# Altium PCB Programming Dongle PCB.PcbDoc
Units mm, origin at the board's own origin, x right, y up, seen from the top; angles counter-clockwise.
Board outline 25 x 18 mm, 4 copper layers (Component Side, Ground Plane, Power Plane, Solder Side), stack 1.1 mm thick; 22 components, 20 nets, 93 pads, 31 vias.
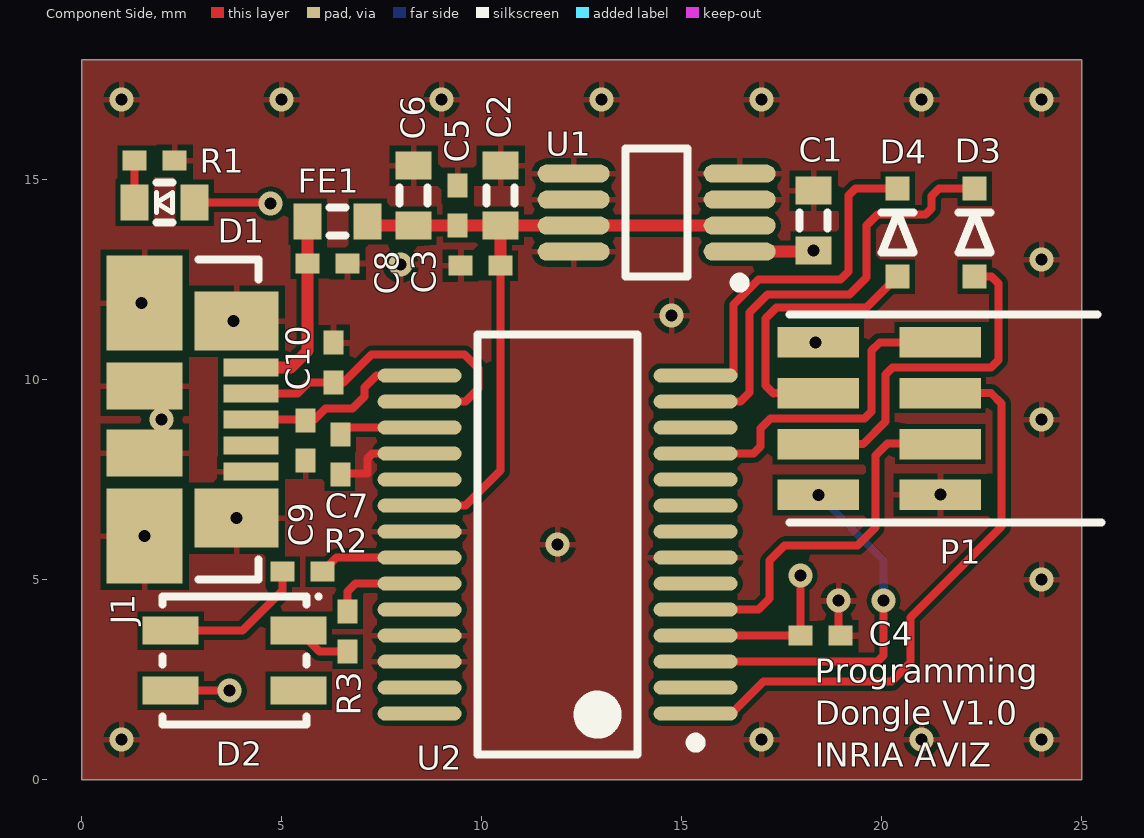
[diagram p0: Component Side view]
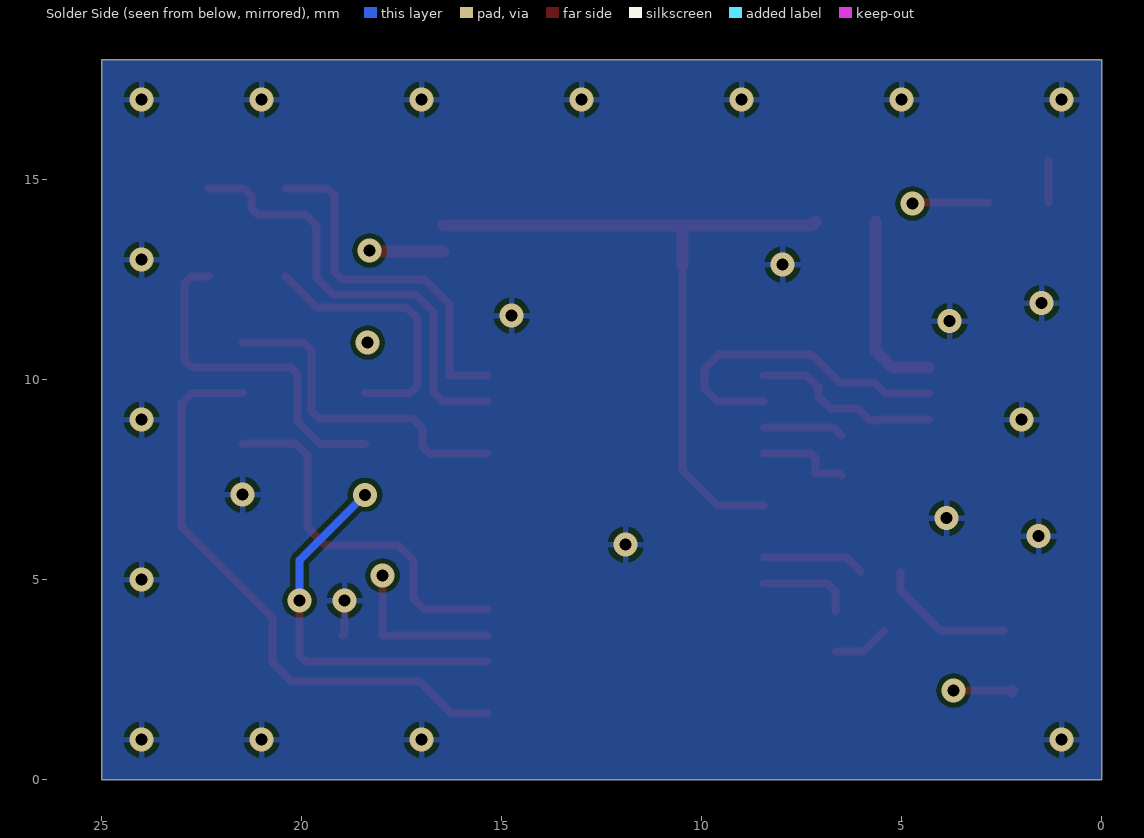
[diagram p1: Solder Side view, seen from below]
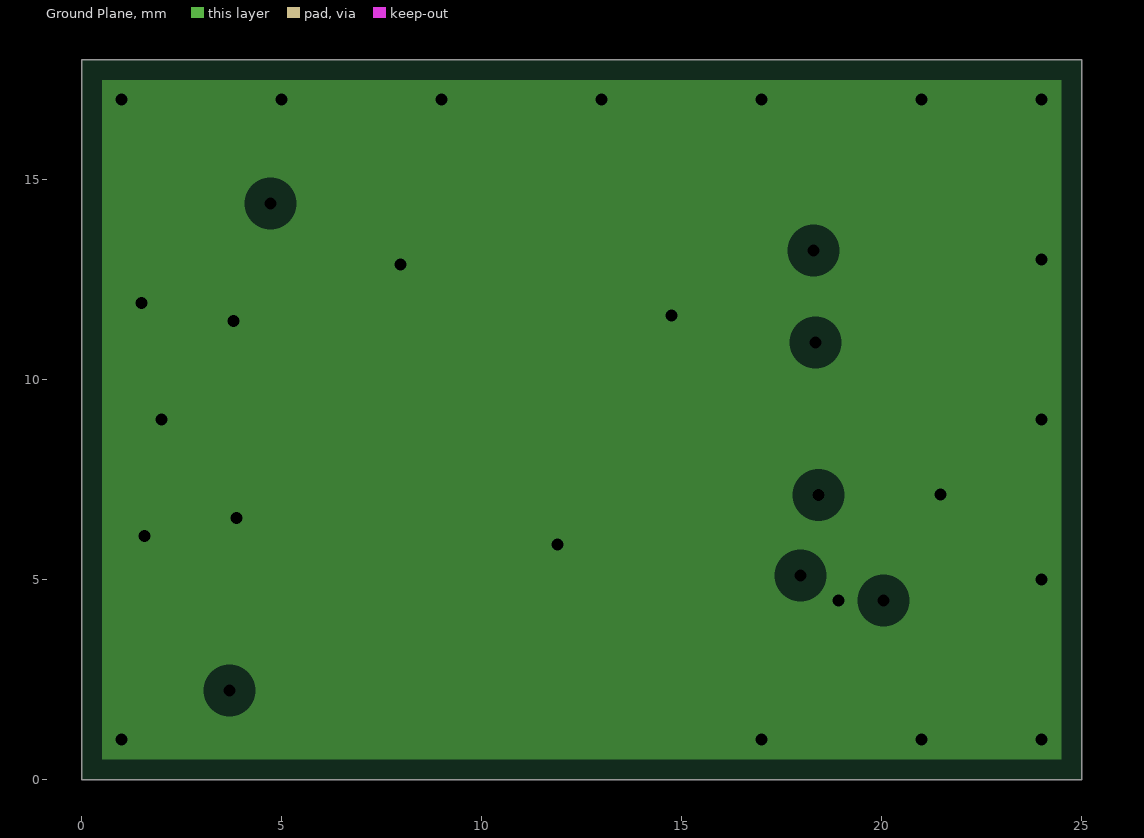
[diagram p2: Ground Plane, clearances drawn from the general rule]
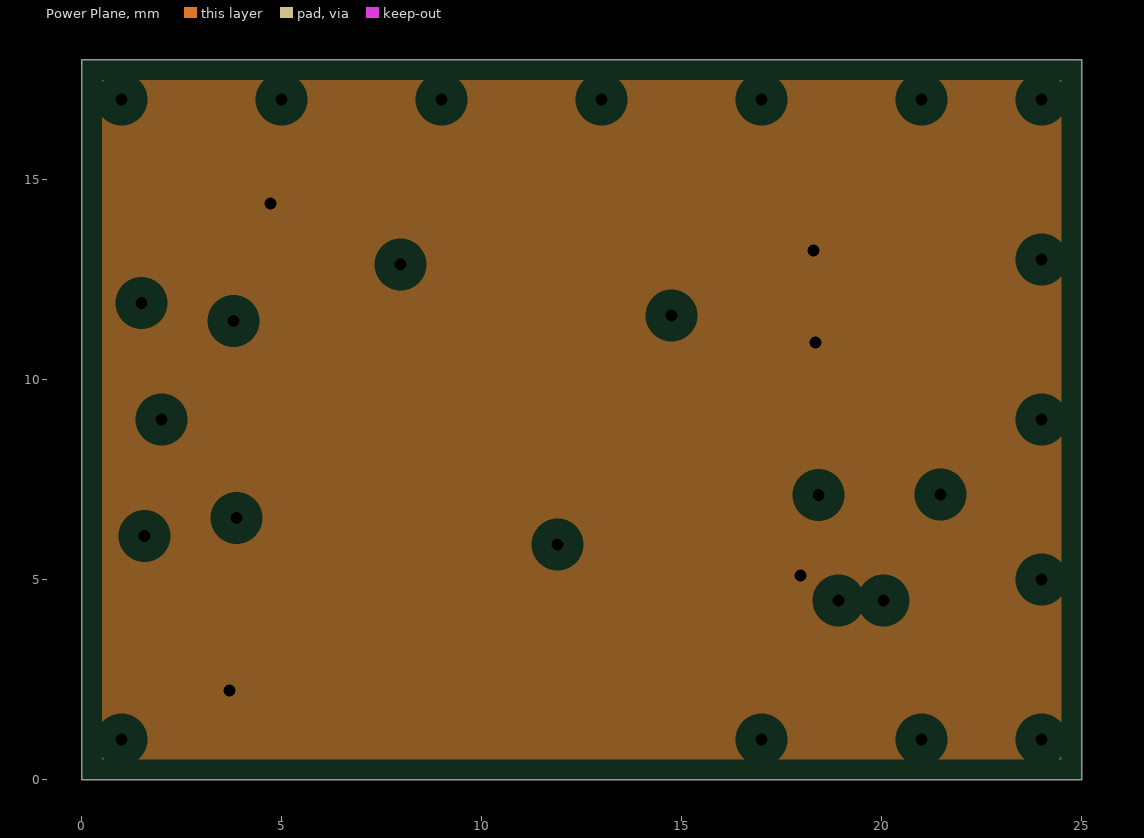
[diagram p3: Power Plane, clearances drawn from the general rule]

## Layer stack, top to bottom
Component Side: signal copper 0.035
Dielectric 1: core 0.3, FR-4, Dk 4.8
Ground Plane: plane copper 0.035, net GND
Dielectric 3: prepreg 0.36, Dk 4.2
Power Plane: plane copper 0.035, net +3.3V
Dielectric 4: core 0.3, Dk 4.2
Solder Side: signal copper 0.035

## Board outline
0,0 0,18 25,18 25,0 0,0

## Design rules (kind name [scope] priority, off if disabled: settings)
Clearance [All] p1: gap=0.125
DiffPairsRouting [All] p1: maxlimit=10 minlimit=0.125 mostfreqgap=0.15 toplayer_minwidth=0.381 toplayer_maxwidth=0.381 toplayer_prefwidth=0.381 bottomlayer_minwidth=0.381 bottomlayer_maxwidth=0.381 bottomlayer_prefwidth=0.381 maxuncoupledlength=12.7
FabricationTestPointUsage FabricationTestPointUsage_1 [All] p1: valid=0 allowmultiple=FALSE
FabricationTestpoint FabricationTestpoint_1 [All] p1: side=3 testpointundercomponent=TRUE minsize=1.016 maxsize=2.54 preferedsize=1.524 minholesize=0 maxholesize=1.016 preferedholesize=0.813 testpointgrid=0.025 allowsidetop=TRUE allowsidebottom=TRUE usegrid=TRUE gridtolerance=0
HoleSize [All] p1: absolutevalues=TRUE maxlimit=6 minlimit=0.2 maxpercent=80.000 minpercent=20.000
HoleSize FabricationTestpoint [All] p2 off: absolutevalues=TRUE maxlimit=2.54 minlimit=0.025 maxpercent=80.000 minpercent=20.000
HoleSize FabricationTestPointUsage [All] p3 off: absolutevalues=TRUE maxlimit=2.54 minlimit=0.025 maxpercent=80.000 minpercent=20.000
MinimumSolderMaskSliver [All] p1: minsoldermaskwidth=0.05
PlaneClearance [All] p1: clearance=0.5
PlaneConnect [All] p1: planeconnectstyle=Relief reliefexpansion=0.4 reliefentries=4 reliefconductorwidth=0.15 reliefairgap=0.15
PolygonConnect [All] p1: connectstyle=Relief reliefconductorwidth=0.15 reliefentries=4 polygonreliefangle="90 Angle" airgapwidth=0.15
RoutingCorners [All] p1: cornerstyle=45-Degree minsetback=1.25 maxsetback=1.25
RoutingVias [All] p1: holewidth=0.3 width=0.6 viastyle="Through Hole" minholewidth=0.3 minwidth=0.6 maxholewidth=0.3 maxwidth=0.6
SilkToBoardRegionClearance [All] p1 off:
SilkToSilkClearance [All] p1: silktosilkclearance=0.1
SilkToSolderMaskClearance [IsPad] p1: minsilkscreentomaskgap=0.1 clearancetoexposedcopper=TRUE
SolderMaskExpansion [All] p1: expansion=0.075
Width [All] p1: maxlimit=0.3 minlimit=0.125 preferedwidth=0.2 minimp=50.000000 maximp=50.000000 favimp=50.000000
18 further rules are at their usual default settings.

## Components (designator, comment, footprint, x,y, rotation, side; value= is the part's Value field where it differs from the comment)
C1 "10uF 0603 X5R 6.3V AVX" 0603 18.3,13.975 r270 top
C2 "1uF 0603 X5R 10V MULTICOMP" 0603 10.475,14.6 r270 top
C3 "100nF 0402 X7R 16V ±10%" 0402 9.975,12.85 r0 top
C4 "100nF 0402 X7R 16V ±10%" 0402 18.475,3.6 r180 top
C5 "100nF 0402 X7R 16V ±10%" 0402 9.4,14.35 r270 top
C6 "4.7uF 0603 X5R 10V KEMET" 0603 8.3,14.6 r270 top
C7 "100nF 0402 X7R 16V ±10%" 0402 6.475,8.125 r270 top
C8 "10nF 0402 X7R 25V KEMET" 0402 6.15,12.9 r0 top
C9 "47pF 0402 NP0 50V MURATA" 0402 5.6,8.475 r90 top
C10 "47pF 0402 NP0 50V MURATA" 0402 6.3,10.425 r270 top
D1 "OVS-0604" "0603 - LED" 2.075,14.425 r180 top
D2 "RGB LED PLCC" PLCC_4 3.825,2.975 r0 top
D3 "Schottky barrier single diode" SOD-323 22.325,13.675 r270 top
D4 "Schottky barrier single diode" SOD-323 20.4,13.675 r270 top
FE1 "MURATA - BLM18PG471SN1D" 0603 6.4,13.95 r0 top
J1 "MICRO USB B" MICRO_USB_B 4.925,9 r0 top
P1 "FTSH-104-04-F-DH" FTSH-104-04-F-DH 17.4,9.025 r0 top
R1 "180R 0402 1% VISHAY" 0402 1.825,15.475 r180 top
R2 "180R 0402 1/16W ±1%" 0402 5.525,5.2 r180 top
R3 "180R 0402 1/16W ±1%" 0402 6.65,3.7 r270 top
U1 "ADP3333ARMZ-3.3-R7" ADI-RM-8_N 14.375,14.175 r180 top
U2 "FT232RL" SSOP-28_N 11.9,5.875 r180 top

## Footprints (in the part's own frame and the unit in brackets; to place one, negate y for a bottom-side part, rotate by r counter-clockwise, add the part's x,y. Pads: shape width x height; smd on the part's side, far side on the other; paste and mask are expansions set on the pad)
0402 [mm] "Chip Body 1.0 x 0.5 mm (LxW typ)"
  rect 0.6x0.5 smd: 1(-0.5,0) 2(0.5,0)
  body extent -0.55,-0.3 0.55,0.3, height 1.3
0603 [mm] "Chip Body 1.6 x 0.8 mm (LxW typ)"
  rect 0.7x0.9 smd: 1(-0.75,0) 2(0.75,0)
  silkscreen extent -0.2,-0.35 0.2,0.35, body extent -0.85,-0.48 0.85,0.48, height 0.9
"0603 - LED" [mm] "Chip Body 1.6 x 0.8 mm (LxW typ)"
  rect 0.7x0.9 smd: 1(-0.75,0) 2(0.75,0)
  silkscreen extent -0.2,-0.5 0.2,0.5, body extent -0.85,-0.48 0.85,0.48, height 0.9
ADI-RM-8_N [mm] "SOP, 8-Leads, Body 3x3mm, Pitch 0.65mm, IPC Medium Density"
  oval 1.8x0.45 smd: 1(-2.075,0.975) 2(-2.075,0.325) 3(-2.075,-0.325) 4(-2.075,-0.975) 5(2.075,-0.975) 6(2.075,-0.325) 7(2.075,0.325) 8(2.075,0.975)
  silkscreen extent -2.2,-1.6 0.77,1.87, body extent -1.6,-1.6 1.6,1.6, height 1.1
FTSH-104-04-F-DH [mil]
  rect 80x30 smd: 1(160,-75) 2(160,-25) 3(160,25) 4(160,75) 5(40,-75) 6(40,-25) 7(40,25) 8(40,75)
  silkscreen extent 12,-102 319,102, body extent 10,-100 469,100, height 135
MICRO_USB_B [mm]
  rect 1.38x0.45 smd: 1(-0.69,1.3) 2(-0.69,0.65) 3(-0.69,0) 4(-0.69,-0.65) 5(-0.69,-1.3)
  rect 2.1x1.475 smd: 6(-1.05,-2.462) 7(-1.05,2.462)
  rect 1.9x1.175 smd: 8(-3.35,-0.837) 9(-3.35,0.837)
  rect 1.9x2.375 smd: 10(-3.35,-2.913) 11(-3.35,2.913)
  silkscreen extent -2,-4 -0.5,4, body extent -5.88,-3.99 -0.45,3.99, height 2.69
PLCC_4 [mm]
  rect 1.4x0.7 smd: 1(1.6,0.75) 2(-1.6,0.75) 3(-1.6,-0.75) 4(1.6,-0.75)
  silkscreen extent -1.8,-1.6 2.1,1.6, body extent -1.8,-1.6 1.8,1.6, height 1.9
SOD-323 [mm]
  rect 0.6x0.6 smd: 1(-1.1,0) 2(1.1,0)
  silkscreen extent -0.5,-0.4 0.5,0.4, body extent -1.05,-0.82 1.05,0.82, height 0.9
SSOP-28_N [mm] "SOP, 28-Leads, Body 10.2x5.3mm, Pitch 0.65mm, IPC Medium Density"
  oval 2.1x0.35 smd: 1(-3.45,4.225) 2(-3.45,3.575) 3(-3.45,2.925) 4(-3.45,2.275) 5(-3.45,1.625) 6(-3.45,0.975) 7(-3.45,0.325) 8(-3.45,-0.325) 9(-3.45,-0.975) 10(-3.45,-1.625) 11(-3.45,-2.275) 12(-3.45,-2.925) 13(-3.45,-3.575) 14(-3.45,-4.225) 15(3.45,-4.225) 16(3.45,-3.575) 17(3.45,-2.925) 18(3.45,-2.275) 19(3.45,-1.625) 20(3.45,-0.975) 21(3.45,-0.325) 22(3.45,0.325) 23(3.45,0.975) 24(3.45,1.625) 25(3.45,2.275) 26(3.45,2.925) 27(3.45,3.575) 28(3.45,4.225)
  silkscreen extent -3.57,-5.25 2,5.25, body extent -2.8,-5.25 2.8,5.25, height 2

## Part data
C1: library part "10uF 0603 X5R 6.3V", "AVX - 06036D106MAT2A - 0603 X5R 6.3V 10UF"
C2: library part "1uF 0603 X5R 10V", "MULTICOMP - MC0603X105K100CT - MLCC 0603 X5R 10V 1UF"
C3 C4 C5 C7: library part "100nF (cheap)"
C6: library part "4.7uF 0603 X5R 10V", "KEMET - C0603C475K8PACTU - CONDENSATEUR 4.7UF 10V X5R 0603"
C8: library part "10nF 0402 X7R 25V", "KEMET - C0402C103J3RACTU - MLCC 0402 25V 0.01UF"
C9 C10: library part "47pF 0402 NP0 50V", "MURATA - GRM1555C1H470JZ01D - 0402 47PF 50V"
D1: library part "LED GREEN", "MULTICOMP - OVS-0604 - LED, 0603, GREEN, 300MCD, 520NM"
D2: library part RGB_LED, "MULTICOMP - 703-1028 - LED RGB 3528 PLCC"
D3 D4: library part 1PS76SB10, "NXP - 1PS76SB10"
FE1: library part FERRITE, "Ferrite Bead (470R ~ 100MHz)"
J1: library part MICRO_USB_B, "MOLEX - 47346-0001 - FEMALE MICRO USB B BOTTOM MOUNT"
P1: "Samtec FTSH 4x2 .050\" Horizontal SMD"
R1: library part "180R 0402 1%", "VISHAY DRALORIC - CRCW0402180RFKED - 0402 180R 1%"
R2 R3: library part 180R
U1: "High Accuracy Ultralow IQ, 300 mA, anyCAP Low Dropout Regulator, 2.6 to 12 V Vin, 3.3 V Vout, Industrial, 8-pin SOP (RM-8), Reel"
U2: "USB UART Asynchronous Serial Data Transfer Chip, SSOP-28, Tape and Reel"

## Via types
v1: diameter 0.6, hole 0.3, Component Side to Solder Side, 31 vias

## Nets (pads, with @x,y where several pads share a name; then routed paths per layer and width w, separated by ;. In a path a pad name is that pad's centre, name@x,y a point inside that pad or via, vN(x,y) a via of type N, cw(c..) or ccw(c..) an arc to the next point about the centre after c; other vN are vias at no path point)
+3.3V: C1.2 C4.2 D1.1 D2.3 P1.8 U1.1 U2.4 | length 9.6
  Component Side w0.2: D2.3 v1(3.7,2.225) ; D1.1 4.7,14.425 v1(4.725,14.4) ; U2.4 C4.2 v1(17.975,5.1)
  Component Side w0.3: D2.3 D2.3@2.25,2.2 ; U1.1 18.275,13.2 v1(18.3,13.225) ; P1.8@18.3,11.046 P1.8
  other v1: 18.35,10.925
GND: C1.1 C2.1 C3.1 C4.1 C5.1 C6.1 C7.2 C8.2 C9.1 C10.1 J1.5 J1.6 J1.7 J1.8 J1.9 J1.10 J1.11 P1.1 R1.1 U1.3 U1.4 U1.5 U1.6 U1.8 U2.7 U2.18 U2.21 U2.25 U2.26 | length 3.3
  Component Side w0.2: C7.2@6.5,7.6 6.55,7.65 7.15,7.65 7.15,8.031 7.269,8.15 U2.18 ; v1(18.925,4.475) 18.925,3.65 C4.1
  other v1: 1,1 17,1 21,1 24,1 24,5 11.9,5.875 1.575,6.087 3.875,6.538 21.475,7.125 2,9 24,9 3.8,11.462 14.75,11.6 1.5,11.913 7.975,12.875 24,13 1,17 5,17 9,17 13,17 17,17 21,17 24,17
LED0: R3.1 U2.23 | length 2.4
  Component Side w0.2: R3.1 6.65,4.7 6.85,4.9 U2.23
LED1: R2.1 U2.22 | length 2.6
  Component Side w0.2: R2.1 6.375,5.55 U2.22
NetC7_1: C7.1 U2.17 | length 2
  Component Side w0.2: C7.1@6.5,8.6 6.7,8.8 U2.17
NetC8_1: C8.1 FE1.1 J1.1 | length 4.7
  Component Side w0.3: J1.1@4.31,10.3 5.225,10.3 5.65,10.725 C8.1 FE1.1
NetD1_2: D1.2 R1.2 | length 1.1
  Component Side w0.2: D1.2 R1.2
NetD2_1: D2.1 R3.2 | length 1.4
  Component Side w0.2: D2.1 5.95,3.2 R3.2
NetD2_2: D2.2 R2.2 | length 3.5
  Component Side w0.2: D2.2@2.45,3.725 4.025,3.725 5.025,4.725 R2.2
NetD3_1: D3.1 U2.13 | length 11.3
  Component Side w0.2: U2.13 16.475,9.45 16.7,9.675 16.7,11.675 17.15,12.125 19.2,12.125 19.625,12.55 19.625,13.85 19.9,14.125 21.1,14.125 21.25,14.275 21.25,14.588 21.437,14.775 D3.1
NetD4_1: D4.1 U2.14 | length 9.1
  Component Side w0.2: U2.14 16.3,10.1 16.3,11.875 16.925,12.5 18.975,12.5 19.175,12.7 19.175,14.6 19.35,14.775 D4.1
PROG_CTS: P1.4 U2.11 | length 8.4
  Component Side w0.2: U2.11 16.8,8.15 16.975,8.325 16.975,8.775 17.225,9.025 19.575,9.025 19.75,9.2 19.75,10.725 19.955,10.93 P1.4
PROG_MISO: D4.2 P1.7 | length 6.8
  Component Side w0.2: P1.7 17.31,9.66 17.3,9.65 17.1,9.85 17.1,11.525 17.375,11.8 19.625,11.8 D4.2
PROG_RTS: P1.5 U2.3 | length 9.4
  Component Side w0.2: U2.3 19.9,2.95 20.05,3.1 20.05,4.425 v1@20.075,4.4
  Solder Side w0.2: v1(18.416,7.12) 20.05,5.486 v1(20.05,4.475)
PROG_RXD: P1.2 U2.5 | length 9.4
  Component Side w0.2: U2.5 16.925,4.25 17.2,4.525 17.2,5.475 17.575,5.85 19.4,5.85 19.85,6.3 19.85,8.1 20.15,8.4 21.454,8.4 P1.2
PROG_TXD: P1.3 U2.1 | length 15
  Component Side w0.2: U2.1 16.25,1.65 17.05,2.45 20.25,2.45 20.725,2.925 20.725,4.05 23,6.325 23,9.4 22.74,9.66 P1.3
R\S\T\: D3.2 P1.6 | length 8.6
  Component Side w0.2: P1.6 19.54,8.39 20.1,8.95 20.1,10.125 20.275,10.3 22.734,10.3 22.925,10.491 22.925,12.4 22.75,12.575 D3.2
USB_D+: C9.2 J1.3 U2.15 | length 4.7
  Component Side w0.2: J1.3@4.31,9 C9.2@5.6,9 ; C9.2 5.8,8.975 6.1,9.275 6.775,9.275 7.075,9.575 7.075,9.8 7.375,10.1 U2.15
USB_D-: C10.2 J1.2 U2.16 | length 8.3
  Component Side w0.2: J1.2@4.31,9.65 5.4,9.65 5.675,9.925 C10.2 6.55,9.925 7.25,10.625 9.575,10.625 9.925,10.275 9.925,9.775 9.6,9.45 U2.16
VCCUSB: C2.2 C3.2 C5.2 C6.2 FE1.2 U1.2 U1.7 U2.20 | length 17.9
  Component Side w0.2: U2.20 9.6,6.85 10.475,7.725 C3.2
  Component Side w0.3: FE1.2 7.25,13.85 C6.2 C5.2 C2.2 ; C3.2 C2.2 ; U1.2 U1.7 C2.2
pads on no net: D2.4 J1.4 U2.2 U2.6 U2.8 U2.9 U2.10 U2.12 U2.19 U2.24 U2.27 U2.28

## Polygon pours and split planes (outlines as drawn)
GND on Component Side "Top Ground Plane" (solid, remove dead copper, pour order 2): 0,0 0,18 25,18 25,0 0,0
GND on Solder Side "Bottom Ground Plane" (solid, remove dead copper, pour order 4): 0,0 25,0 25,18 0,18 0,0
GND on Ground Plane (split plane): 24.49,0.51 0.51,0.51 0.51,17.49 24.49,17.49
+3.3V on Power Plane (split plane): 24.49,0.51 0.51,0.51 0.51,17.49 24.49,17.49

## Silkscreen, mask and mechanical layers (free items; w line width, h text height)
Top Overlay:
  text "Programming" at 18.325,2.425 h0.6
  text "Dongle V1.0" at 18.325,1.375 h0.6
  text "INRIA AVIZ" at 18.325,0.325 h0.6
Board Outline:
  the board outline again, w0.1